# Altium PCB PCB.pcbdoc
Units mm, origin at the board's own origin, x right, y up, seen from the top; angles counter-clockwise.
Board outline 133.95 x 51.98 mm, 4 copper layers (Top Layer, Inner1, Inner2, Bottom Layer); 41 components, 31 nets, 209 pads, 446 vias.
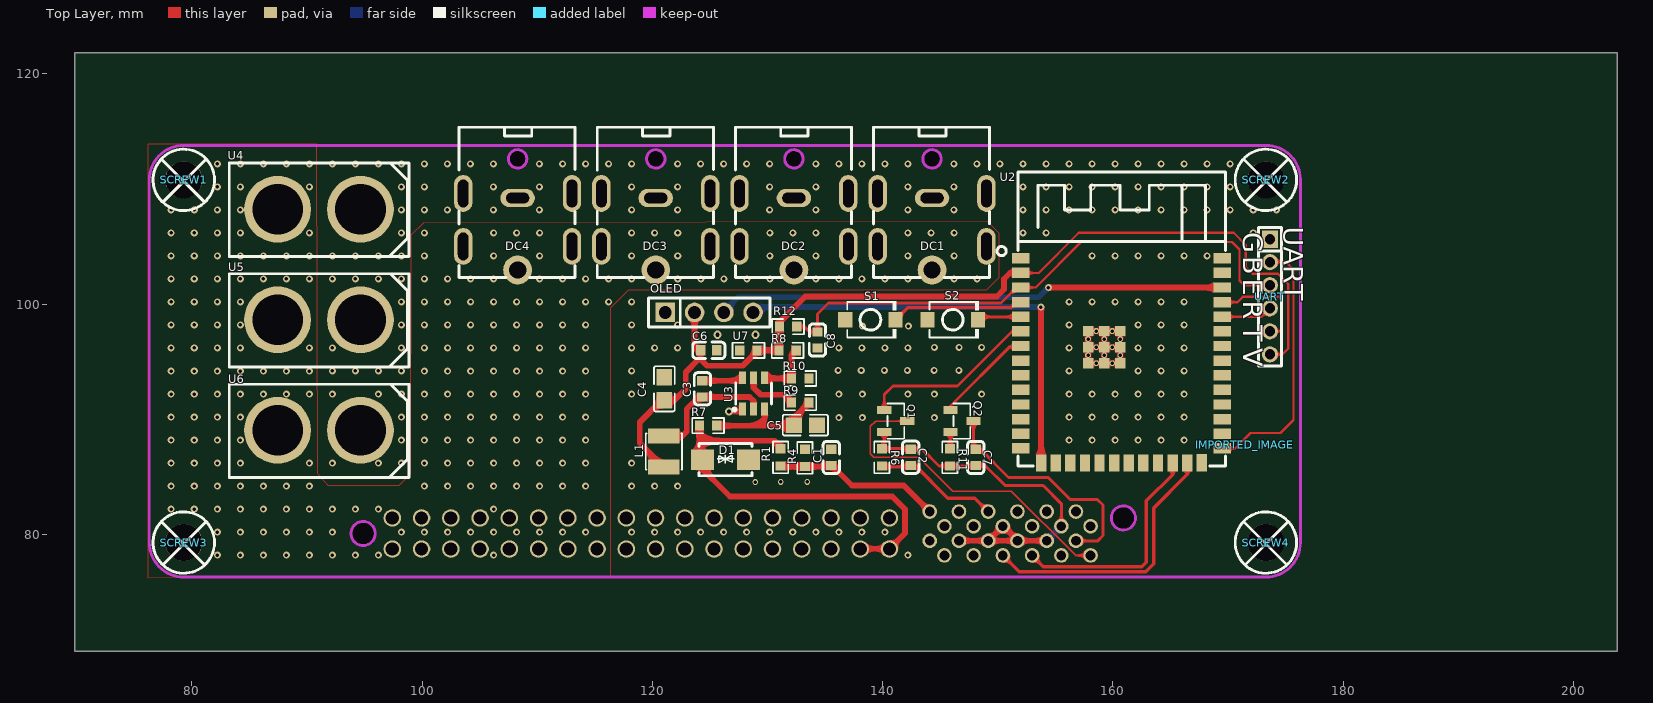
[diagram p0: Top Layer view]
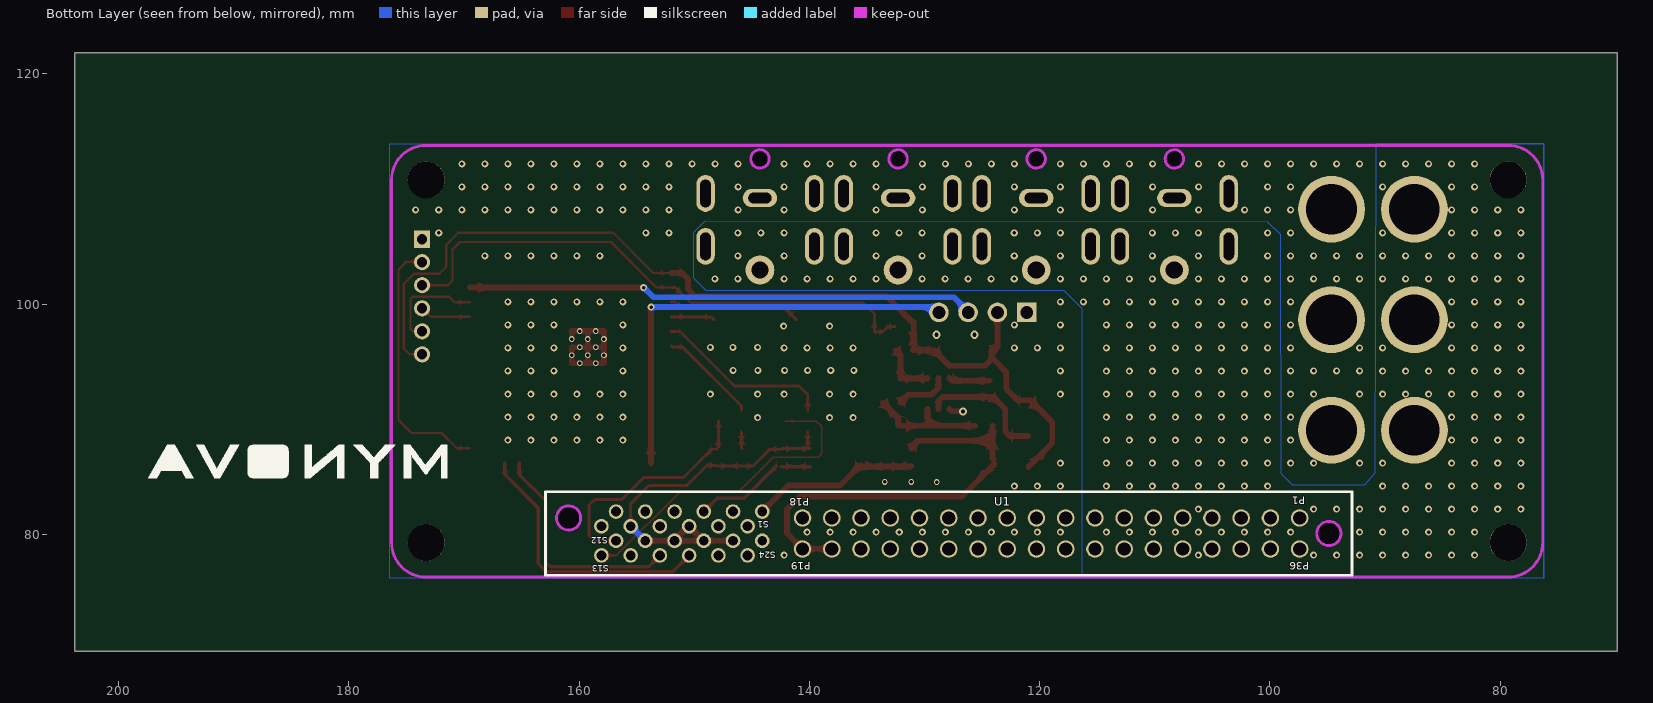
[diagram p1: Bottom Layer view, seen from below]

## Layer stack, top to bottom
Top Layer: signal copper (thickness not stored)
Dielectric: dielectric 0.32, FR-4, Dk 4.8
Inner1: signal copper (thickness not stored)
Dielectric: dielectric 0.32, FR-4, Dk 4.8
Inner2: signal copper (thickness not stored)
Dielectric: dielectric 0.32, FR-4, Dk 4.8
Bottom Layer: signal copper (thickness not stored)

## Board outline
203.8,69.85 69.85,69.85 69.85,121.826 203.8,121.826

## Design rules (kind name [scope] priority, off if disabled: settings)
Clearance copperThickness1oz [All] p1: gap=0.178 ignorepadtopadclearanceinfootprint=FALSE except(0.102: Track-Track; 0.152: Track-SMDPad SMDPad-SMDPad Track-THPad SMDPad-THPad THPad-THPad Track-Via SMDPad-Via THPad-Via Via-Via Track-Fill SMDPad-Fill THPad-Fill Via-Fill Fill-Fill SMDPad-Region THPad-Region Via-Region Fill-Region Region-Region Track-Poly SMDPad-Poly THPad-Poly Via-Poly Fill-Poly Poly-Poly Track-Text SMDPad-Text THPad-Text Via-Text Fill-Text Region-Text Poly-Text Text-Text Track-Hole SMDPad-Hole THPad-Hole Via-Hole Fill-Hole Region-Hole Poly-Hole Text-Hole; 0.3: Track-Region Region-Poly Track-Sheet SMDPad-Sheet THPad-Sheet Via-Sheet Fill-Sheet Region-Sheet Poly-Sheet Text-Sheet Sheet-Hole)
Clearance copperThickness2oz [All] p1: gap=0.178 ignorepadtopadclearanceinfootprint=FALSE except(0.152: Track-SMDPad SMDPad-SMDPad Track-THPad SMDPad-THPad THPad-THPad Track-Via SMDPad-Via THPad-Via Via-Via Track-Fill SMDPad-Fill THPad-Fill Via-Fill Fill-Fill SMDPad-Region THPad-Region Via-Region Fill-Region Region-Region Track-Poly SMDPad-Poly THPad-Poly Via-Poly Fill-Poly Poly-Poly Track-Text SMDPad-Text THPad-Text Via-Text Fill-Text Region-Text Poly-Text Text-Text Track-Hole SMDPad-Hole THPad-Hole Via-Hole Fill-Hole Region-Hole Poly-Hole Text-Hole; 0.203: Track-Track; 0.3: Track-Region Region-Poly Track-Sheet SMDPad-Sheet THPad-Sheet Via-Sheet Fill-Sheet Region-Sheet Poly-Sheet Text-Sheet Sheet-Hole)
DiffPairsRouting differentialPair [All] p1: maxuncoupledlength=10 minlimit=0 maxlimit=5.9843 mostfreqgap=5.9843 toplayer_minwidth=5 toplayer_prefwidth=10 toplayer_maxwidth=100 bottomlayer_minwidth=5 bottomlayer_prefwidth=10 bottomlayer_maxwidth=100 midlayer1_minwidth=5 midlayer1_prefwidth=10 midlayer1_maxwidth=100 midlayer2_minwidth=5 midlayer2_prefwidth=10 midlayer2_maxwidth=100
PasteMaskExpansion pasteMaskExpansion [All] p1: expansion=0
PlaneConnect innerPlane [All] p1: planeconnectstyle=Relief reliefexpansion=0.508 reliefentries=4 reliefconductorwidth=0.254 reliefairgap=0.254
PolygonConnect copperRegion [All] p1: connectstyle=Relief reliefentries=4 reliefconductorwidth=10 polygonreliefangle="90 Angle" airgapwidth=10
PolygonConnect copperDirect [All] p1: connectstyle=Direct reliefentries=4 reliefconductorwidth=10 polygonreliefangle="90 Angle" airgapwidth=10
RoutingVias viaSize [All] p1: viastyle="Through Hole" holewidth=12.0078 minholewidth=11.811 maxholewidth=248.0314 width=24.0158 minwidth=19.685 maxwidth=393.7008
SolderMaskExpansion solderMaskExpansion [All] p1: useseparateexpansions=TRUE expansion=2.0079 expansionbottom=2.0079
Width copperThickness1oz [All] p1: maxlimit=100 minlimit=5 preferedwidth=10
Width copperThickness2oz [All] p1: maxlimit=100 minlimit=8 preferedwidth=10

## Components (designator, comment, footprint, x,y, rotation, side; value= is the part's Value field where it differs from the comment)
C1 "CC0603JRNPO9BN101" C0603 135.55,86.701 r90 top
C2 "CC0603JRNPO9BN101" C0603 142.445,86.701 r270 top
C3 "0603B104K500NT" C0603 124.35,92.651 r270 top
C4 "CL21A476MQYNNNE" C0805 121.05,92.651 r90 top
C5 "CL21A106KAYNNNE_C15850" C0805 133.3,89.501 r0 top
C6 "0603B104K500NT" C0603 124.9,96 r180 top
C7 "CC0603JRNPO9BN101" C0603 148.1,86.701 r90 top
C8 "CC0603KRX5R8BB105" C0603 134.35,96.901 r90 top
D1 "SMAJ12CA_C698919" SMA_L4.4-W2.6-LS5.0-BI 126.35,86.501 r180 top
DC1 "DC-091-A250" DC-IN-TH_DC-091-A250 144.3,106.301 r270 top
DC2 "DC-091-A250" DC-IN-TH_DC-091-A250 132.3,106.301 r270 top
DC3 "DC-091-A250" DC-IN-TH_DC-091-A250 120.3,106.301 r270 top
DC4 "DC-091-A250" DC-IN-TH_DC-091-A250 108.3,106.301 r270 top
IMPORTED_IMAGE "IMPORTED_IMAGE" IMPORTED_IMAGE 171.45,87.801 r0 top
L1 "SWPA3015S4R7MT" IND-SMD_L3.0-W3.0_FNR30XXS 121,87.201 r90 top
OLED "2.54-1*4P母" HDR-TH_4P-P2.54-V-F 124.941,99.288 r0 top
Q1 "DTC143ZCA_C15236" SOT-23-3_L2.9-W1.3-P1.90-LS2.4-BR 141.15,89.851 r180 top
Q2 "DTC143ZCA_C15236" SOT-23-3_L2.9-W1.3-P1.90-LS2.4-BR 146.9,89.851 r180 top
R1 "RC0603FR-078K2L" R0603 131.15,86.701 r90 top
R4 "RC0603FR-073KL" R0603 133.25,86.651 r270 top
R6 "RC0603FR-071KL" R0603 139.95,86.701 r90 top
R7 "0603WAF0000T5E" R0603 124.85,89.451 r180 top
R8 "RC0603FR-07100KL" R0603 131.75,96.001 r180 top
R9 "RC0603FR-07100KL" R0603 132.85,91.451 r0 top
R10 "0603WAF3162T5E" R0603 132.85,93.551 r180 top
R11 "0603WAF2200T5E" R0603 145.85,86.701 r90 top
R12 "0603WAF1002T5E" R0603 131.8,98.051 r180 top
S1 "TS-1088-AR02016" SW-SMD_L3.9-W3.0-P4.45 138.95,98.651 r0 top
S2 "TS-1088-AR02016" SW-SMD_L3.9-W3.0-P4.45 146.1,98.651 r0 top
SCREW1 "M3螺丝" M3螺丝 79.363,110.737 r0 top
SCREW2 "M3螺丝" M3螺丝 173.363,110.737 r0 top
SCREW3 "M3螺丝" M3螺丝 79.363,79.237 r0 top
SCREW4 "M3螺丝" M3螺丝 173.363,79.237 r0 top
U1 "10114587-001LF" 10114587-001LF 127.9,80.086 r0 bottom
U2 "ESP32-S3-WROOM-1-N16" WIRELM-SMD_ESP32-S3-WROOM-1 160.755,95.097 r0 top
U3 "MT1470" SOT-23-6_L2.9-W1.6-P0.95-LS2.8-BR 128.8,92.251 r270 top
U4 "XT60" CONN-TH_XT60 91.05,108.251 r180 top
U5 "XT60" CONN-TH_XT60 91.05,98.651 r180 top
U6 "XT60" CONN-TH_XT60 91.05,89.051 r180 top
U7 "VC060303A100DP" R0603 128.35,96.001 r0 top
UART "PZ200V-11-06P" 6PIN-2MM-UART 173.65,100.651 r270 top

## Footprints (in the part's own frame and the unit in brackets; to place one, negate y for a bottom-side part, rotate by r counter-clockwise, add the part's x,y. Pads: shape width x height; smd on the part's side, far side on the other; paste and mask are expansions set on the pad)
6PIN-2MM-UART [mm]
  round 1.4 hole 0.9: BOOT(-3,0) EN(-1,0) RXD(1,0) TXD(3,0) VCC(5,0)
  rect 1.524x1.4 hole 0.9: GND(-5,0)
  silkscreen extent -6,-1 6,1.02
10114587-001LF [mm]
  round 1.524 hole 1.15: P1(-30.48,-1.35) P2(-27.94,-1.35) P3(-25.4,-1.35) P4(-22.86,-1.35) P5(-20.32,-1.35) P6(-17.78,-1.35) P7(-15.24,-1.35) P8(-12.7,-1.35) P9(-10.16,-1.35) P10(-7.62,-1.35) P11(-5.08,-1.35) P12(-2.54,-1.35) P13(0,-1.35) P14(2.54,-1.35) P15(5.08,-1.35) P16(7.62,-1.35) P17(10.16,-1.35) P18(12.7,-1.35) P19(12.7,1.35) P20(10.16,1.35) P21(7.62,1.35) P22(5.08,1.35) P23(2.54,1.35) P24(0,1.35) P25(-2.54,1.35) P26(-5.08,1.35) P27(-7.62,1.35) P28(-10.16,1.35) P29(-12.7,1.35) P30(-15.24,1.35) P31(-17.78,1.35) P32(-20.32,1.35) P33(-22.86,1.35) P34(-25.4,1.35) P35(-27.94,1.35) P36(-30.48,1.35)
  round 1.27 hole 0.85: S1(16.2,-1.905) S2(17.47,-0.635) S3(18.74,-1.905) S4(20.01,-0.635) S5(21.28,-1.905) S6(22.55,-0.635) S7(23.82,-1.905) S8(25.09,-0.635) S9(26.36,-1.905) S10(27.63,-0.635) S11(28.9,-1.905) S12(30.17,-0.635) S13(30.17,1.905) S14(28.9,0.635) S15(27.63,1.905) S16(26.36,0.635) S17(25.09,1.905) S18(23.82,0.635) S19(22.55,1.905) S20(21.28,0.635) S21(20.01,1.905) S22(18.74,0.635) S23(17.47,1.905) S24(16.2,0.635)
  Multi-Layer board cut-out: -31.97,0 -32.111,-0.525 -32.495,-0.909 -33.02,-1.05 -33.545,-0.909 -33.929,-0.525 -34.07,0 -34.07,0 -33.966,0.456 -33.675,0.821 -33.254,1.024 -32.786,1.024 -32.365,0.821 -32.074,0.456 -31.97,0
  Multi-Layer board cut-out: 34.07,-1.35 33.929,-1.875 33.545,-2.259 33.02,-2.4 32.495,-2.259 32.111,-1.875 31.97,-1.35 31.97,-1.35 32.074,-0.894 32.365,-0.529 32.786,-0.326 33.254,-0.326 33.675,-0.529 33.966,-0.894 34.07,-1.35
  Multi-Layer keep-out circle w0.254: c-33.02,0 r1.05
  Multi-Layer keep-out circle w0.254: c33.02,-1.35 r1.05
  silkscreen extent -35.04,-3.62 35.04,3.63
C0603 [mm]
  rect 0.8x0.9 smd: 1(-0.7,0) 2(0.7,0)
  silkscreen extent -1.41,-0.71 1.39,0.72
C0805 [mm]
  rect 1.41x1.35 smd: 1(-1,0) 2(1,0)
  silkscreen extent -1.96,-0.9 1.96,0.9
CONN-TH_XT60 [mm]
  round 5.8 hole 4.4: 1(-3.6,0) 2(3.6,0)
  silkscreen extent -7.8,-4 7.8,4.1
DC-IN-TH_DC-091-A250 [mm]
  round 2.5 hole 1.5: 3(3.325,0)
  oval 1.6x3 hole 0.914 slot 2 at 90 deg: 4(-2.925,0)
  oval 3.2x1.6 hole 0.914 slot 2.4 at 0 deg copper offset 0,0: 6(-3.325,-4.725)
  oval 3.2x1.6 hole 0.914 slot 2.4 at 0 deg: 6(-3.325,4.725) 6(1.275,4.725) 6(1.275,-4.725)
  Multi-Layer board cut-out: -6.325,0.8 -6.721,0.69 -7.011,0.398 -7.116,0 -7.011,-0.397 -6.721,-0.69 -6.325,-0.8 -6.325,-0.8 -5.929,-0.69 -5.639,-0.398 -5.533,0 -5.639,0.398 -5.929,0.69 -6.325,0.8
  Multi-Layer keep-out circle w0.254: c-6.325,0 r0.8
  silkscreen extent -9.07,-5.08 3.99,5
HDR-TH_4P-P2.54-V-F [mm]
  rect 1.7x1.7 hole 1.1: 1(-3.81,0)
  round 1.7 hole 1.1: 2(-1.27,0) 3(1.27,0) 4(3.81,0)
  silkscreen extent -5.29,-1.27 5.29,1.27
IMPORTED_IMAGE [mm]
IND-SMD_L3.0-W3.0_FNR30XXS [mm]
  rect 1.3x2.72 smd: 1(1.35,0) 2(-1.35,0)
  silkscreen extent -1.58,-1.58 1.58,1.58
M3螺丝 [mil]
  round 126 hole 126: 1(-2.5,2.5)
  silkscreen extent -107,-102 102,107
R0603 [mm]
  rect 0.806x0.864 smd: 1(-0.753,0) 2(0.753,0)
  silkscreen extent -1.39,-0.66 1.39,0.66
SMA_L4.4-W2.6-LS5.0-BI [mm]
  rect 2x1.8 smd: 1(-2,0) 2(2,0)
  silkscreen extent -2.3,-1.4 2.3,1.4
SOT-23-3_L2.9-W1.3-P1.90-LS2.4-BR [mm]
  rect 1.25x0.7 smd: 1(1,-0.95) 2(1,0.95) 3(-1,0)
  silkscreen extent -0.73,-1.53 0.73,1.53
SOT-23-6_L2.9-W1.6-P0.95-LS2.8-BR [mm]
  rect 1.1x0.6 smd: 1(1.35,-0.95) 2(1.35,0) 3(1.35,0.95) 4(-1.35,0.95) 5(-1.35,0) 6(-1.35,-0.95)
  silkscreen extent -0.9,-1.78 1.52,1.55
SW-SMD_L3.9-W3.0-P4.45 [mm]
  rect 1.23x1.36 smd: 1(-2.185,0) 2(2.185,0)
  silkscreen extent -2.03,-1.62 2.25,1.62
WIRELM-SMD_ESP32-S3-WROOM-1 [mm]
  rect 1.5x0.9 smd: 1(-8.75,8.895) 2(-8.75,7.625) 3(-8.75,6.355) 4(-8.75,5.085) 5(-8.75,3.815) 6(-8.75,2.545) 7(-8.75,1.275) 8(-8.75,0.005) 9(-8.75,-1.265) 10(-8.75,-2.535) 11(-8.75,-3.805) 12(-8.75,-5.075) 13(-8.75,-6.345) 14(-8.75,-7.615) 27(8.75,-7.615) 28(8.75,-6.345) 29(8.75,-5.075) 30(8.75,-3.805) 31(8.75,-2.535) 32(8.75,-1.265) 33(8.75,0.005) 34(8.75,1.275) 35(8.75,2.545) 36(8.75,3.815) 37(8.75,5.085) 38(8.75,6.355) 39(8.75,7.625) 40(8.75,8.895)
  rect 0.9x1.5 smd: 15(-6.985,-8.895) 16(-5.715,-8.895) 17(-4.445,-8.895) 18(-3.175,-8.895) 19(-1.905,-8.895) 20(-0.635,-8.895) 21(0.635,-8.895) 22(1.905,-8.895) 23(3.175,-8.895) 24(4.445,-8.895) 25(5.715,-8.895) 26(6.985,-8.865)
  rect 0.9x0.9 smd: 41(-2.9,-0.225) 41(-2.9,1.175) 41(-2.9,2.575) 41(-1.5,-0.225) 41(-1.5,1.175) 41(-1.5,2.575) 41(-0.1,-0.225) 41(-0.1,1.175) 41(-0.1,2.575)
  silkscreen extent -10.81,-9.14 9.02,16.39

## Via types
v1: diameter 0.61, hole 0.304, Top Layer to Bottom Layer, 426 vias
v2: diameter 0.5, hole 0.3, Top Layer to Bottom Layer, 15 vias
v3: diameter 0.7, hole 0.35, Top Layer to Bottom Layer, 3 vias
v4: diameter 0.61, hole 0.305, Top Layer to Bottom Layer, 2 vias

## Nets (pads, with @x,y where several pads share a name; then routed paths per layer and width w, separated by ;. In a path a pad name is that pad's centre, name@x,y a point inside that pad or via, vN(x,y) a via of type N, cw(c..) or ccw(c..) an arc to the next point about the centre after c; other vN are vias at no path point)
$1N522: C3.1 U3.6 | length 3.6
  Top Layer w0.5: C3.1 127.6,93.351 U3.6
$1N523: C3.2 L1.1 U3.2 | length 11.2
  Top Layer w0.5: L1.1 122.61,88.551 123,88.941 123,90.901 124.05,91.951 C3.2 128.45,91.951 128.453,91.954 128.8,91.608 U3.2
$1N528: C5.1 R7.1 R9.2 U3.3 | length 10.9
  Top Layer w0.5: R7.1 129.15,89.451 ; U3.3 129.75,90.051 129.15,89.451 ; R9.2 132.3,90.147 C5.1 132.25,89.451 129.15,89.451
$1N529: R8.1 R10.2 U3.4 | length 5
  Top Layer w0.5: U3.4 129.8,93.551 R10.2 132.097,95.594 R8.1
$1N530: R9.1 U3.5 | length 4.7
  Top Layer w0.5: U3.5 128.8,92.751 129.418,92.133 131.443,92.133 132.097,91.479 R9.1
$1N27262: S2.2 U2.5 | length 3.8
  Top Layer w0.254: S2.2 148.535,98.901 151.994,98.901 U2.5
$1N27273: S1.2 U2.4 | length 11.5
  Top Layer w0.254: S1.2 142.185,99.701 151.15,99.701 151.631,100.182 U2.4
$1N46277: Q2.2 R11.2 | length 1.5
  Top Layer w0.254: R11.2 145.9,87.504 Q2.2
+12V: DC1.3 DC2.3 DC3.3 DC4.3 U1.P1 U1.P2 U1.P3 U1.P4 U1.P5 U1.P6 U1.P7 U1.P8 U1.P29 U1.P30 U1.P31 U1.P32 U1.P33 U1.P34 U1.P35 U1.P36 U4.2 U5.2 U6.2
  other v1: 82.21,78.2 84.21,78.2 86.21,78.2 88.21,78.2 90.21,78.2 92.21,78.2 94.21,78.2 96.21,78.2 106.21,78.2 82.21,80.2 84.21,80.2 86.21,80.2 88.21,80.2 90.21,80.2 92.21,80.2 98.21,80.2 100.21,80.2 102.21,80.2 104.21,80.2 106.21,80.2 108.21,80.2 110.21,80.2 112.21,80.2 114.21,80.2 78.21,82.2 80.21,82.2 82.21,82.2 84.21,82.2 86.21,82.2 88.21,82.2 90.21,82.2 92.21,82.2 94.21,82.2 96.21,82.2 106.21,82.2 78.21,84.2 80.21,84.2 82.21,84.2 84.21,84.2 86.21,84.2 88.21,84.2 90.21,84.2 100.21,84.2 102.21,84.2 104.21,84.2 106.21,84.2 108.21,84.2 110.21,84.2 112.21,84.2 114.21,84.2 78.21,86.2 80.21,86.2 82.21,86.2 84.21,86.2 90.21,86.2 100.21,86.2 102.21,86.2 104.21,86.2 106.21,86.2 108.21,86.2 110.21,86.2 112.21,86.2 114.21,86.2 78.21,88.2 80.21,88.2 82.21,88.2 84.21,88.2 100.21,88.2 102.21,88.2 104.21,88.2 106.21,88.2 108.21,88.2 110.21,88.2 112.21,88.2 114.21,88.2 78.21,90.2 80.21,90.2 82.21,90.2 84.21,90.2 100.21,90.2 102.21,90.2 104.21,90.2 106.21,90.2 108.21,90.2 110.21,90.2 112.21,90.2 114.21,90.2 78.21,92.2 80.21,92.2 82.21,92.2 84.21,92.2 86.21,92.2 88.21,92.2 90.21,92.2 100.21,92.2 102.21,92.2 104.21,92.2 106.21,92.2 108.21,92.2 110.21,92.2 112.21,92.2 114.21,92.2 78.21,94.2 80.21,94.2 82.21,94.2 84.21,94.2 86.21,94.2 88.21,94.2 90.21,94.2 100.21,94.2 102.21,94.2 104.21,94.2 106.21,94.2 108.21,94.2 110.21,94.2 112.21,94.2 114.21,94.2 78.21,96.2 80.21,96.2 82.21,96.2 84.21,96.2 90.21,96.2 100.21,96.2 102.21,96.2 104.21,96.2 106.21,96.2 108.21,96.2 110.21,96.2 112.21,96.2 114.21,96.2 78.21,98.2 80.21,98.2 82.21,98.2 84.21,98.2 100.21,98.2 102.21,98.2 104.21,98.2 106.21,98.2 108.21,98.2 110.21,98.2 112.21,98.2 114.21,98.2 78.21,100.2 80.21,100.2 82.21,100.2 84.21,100.2 100.21,100.2 102.21,100.2 104.21,100.2 106.21,100.2 108.21,100.2 110.21,100.2 112.21,100.2 114.21,100.2 116.21,100.2 78.21,102.2 80.21,102.2 82.21,102.2 84.21,102.2 86.21,102.2 88.21,102.2 90.21,102.2 100.21,102.2 102.21,102.2 104.21,102.2 106.21,102.2 110.21,102.2 112.21,102.2 114.21,102.2 116.21,102.2 118.21,102.2 122.21,102.2 124.21,102.2 126.21,102.2 128.21,102.2 130.21,102.2 134.21,102.2 136.21,102.2 138.21,102.2 140.21,102.2 142.21,102.2 146.21,102.2 148.21,102.2 78.21,104.2 80.21,104.2 82.21,104.2 84.21,104.2 86.21,104.2 88.21,104.2 90.21,104.2 100.21,104.2 106.21,104.2 110.21,104.2 118.21,104.2 122.21,104.2 130.21,104.2 134.21,104.2 142.21,104.2 146.21,104.2 78.21,106.2 80.21,106.2 82.21,106.2 84.21,106.2 90.21,106.2 100.21,106.2 106.21,106.2 108.21,106.2 110.21,106.2 118.21,106.2 120.21,106.2 122.21,106.2 130.21,106.2 132.21,106.2 134.21,106.2 142.21,106.2 144.21,106.2 146.21,106.2 78.21,108.2 80.21,108.2 82.21,108.2 84.21,108.2 82.21,110.2 84.21,110.2 90.21,110.2 82.21,112.2 84.21,112.2 86.21,112.2 88.21,112.2 90.21,112.2
+12VSB: D1.2 R1.2 R7.2 U1.P19 U1.P20 | length 36.5
  Top Layer w0.5: D1.2@123.953,86.097 126.75,83.301 140.85,83.301 141.95,82.201 141.95,80.101 140.6,78.751 U1.P20@138.128,78.751 ; D1.2@124.02,86.501 124.097,86.577 124.097,88.138 ; R7.2 124.097,88.138 ; R1.2 131.15,87.601 130.6,88.151 130.1,88.151 130.088,88.138 124.097,88.138
AC_OK: C2.2 R6.1 U1.S5 | length 10.4
  Top Layer w0.3: C2.2@142.871,85.951 145.671,83.151 148.02,83.151 U1.S5
  Top Layer w0.305: R6.1@139.95,85.897 C2.2@142.445,85.897
BOOT: U2.27 UART.BOOT | length 22.6
  Top Layer w0.2: U2.27 170.631,87.482 171.961,88.812 174.561,88.812 175.7,89.951 175.7,103.001 175,103.701 173.7,103.701 UART.BOOT
EN: C8.2 R12.1 U2.3 UART.EN | length 48.5
  Top Layer w0.2: U2.3 153.301,101.452 157.25,105.401 170.35,105.401 171,104.751 171,102.051 171.4,101.651 UART.EN@173.6,101.651
  Top Layer w0.254: R12.1 133.196,98.051 133.646,97.601 C8.2 134.35,99.151 135.3,100.101 150.295,100.101 151.646,101.452 U2.3
GND: C1.2 C4.2 C5.2 C6.1 C8.1 D1.1 DC1.4 DC2.4 DC3.4 DC4.4 OLED.1 R4.1 R10.1 S1.1 S2.1 U1.P9 U1.P10 U1.P11 U1.P12 U1.P13 U1.P14 U1.P15 U1.P16 U1.P17 U1.P18 U1.P21 U1.P22 U1.P23 U1.P24 U1.P25 U1.P26 U1.P27 U1.P28 U2.1 U2.40 U2.41 U3.1 U4.1 U5.1 U6.1 U7.1 UART.GND | length 17.5
  Top Layer w0.5: v3(126.65,90.701) 127.65,90.701 U3.1 ; v2(160.655,96.972) 160.655,97.672 v2(159.955,97.672) U2.41@159.255,97.672 ; U2.41@157.855,96.272 v2(158.555,96.272) U2.41@159.255,96.272 ; U2.41@157.855,96.272 v2(157.855,95.572) 157.855,94.872 v2(158.555,94.872) U2.41@159.05,94.872 ; U2.41@157.855,96.272 v2(157.855,96.972) 157.855,97.672 v2(158.555,97.672) U2.41@159.255,97.672 ; U2.41@159.05,94.872 159.255,94.872 v2(159.955,94.872) 160.655,94.872 v2(160.655,95.572) 160.655,96.272 v2(159.955,96.272) U2.41@159.255,96.272 ; U2.41@159.05,94.872 159.255,95.076 v2(159.255,95.572) U2.41@159.255,96.272 ; U2.41@159.255,96.272 v2(159.255,96.972) U2.41@159.255,97.672
  other v1: 142.2,78.201 118.2,80.201 120.2,80.201 122.2,80.201 124.2,80.201 126.2,80.201 128.2,80.201 130.2,80.201 132.2,80.201 134.2,80.201 136.2,80.201 138.2,80.201 140.2,80.201 118.2,84.201 120.2,84.201 122.2,84.201 92.2,86.201 96.2,86.201 98.2,86.201 118.2,86.201 98.2,88.201 156.2,88.201 158.2,88.201 160.2,88.201 162.2,88.201 164.2,88.201 166.2,88.201 136.2,90.151 138.25,90.151 144.5,90.151 98.2,90.201 156.2,90.201 158.2,90.201 160.2,90.201 162.2,90.201 164.2,90.201 166.2,90.201 92.2,92.201 96.2,92.201 98.2,92.201 118.2,92.201 136.2,92.201 138.25,92.201 142.2,92.201 144.5,92.201 148.6,92.201 156.2,92.201 158.2,92.201 160.2,92.201 162.2,92.201 164.2,92.201 166.2,92.201 92.2,94.201 94.2,94.201 96.2,94.201 98.2,94.201 118.2,94.201 156.2,94.201 162.2,94.201 164.2,94.201 166.2,94.201 136.15,94.251 138.15,94.251 140.15,94.251 142.15,94.251 144.475,94.251 146.625,94.251 92.2,96.201 98.2,96.201 118.2,96.201 120.2,96.201 122.2,96.201 136.2,96.201 138.2,96.201 140.2,96.201 142.2,96.201 156.2,96.201 162.2,96.201 164.2,96.201 166.2,96.201 144.5,96.251 146.65,96.251 148.6,96.251 138.25,98.101 142.25,98.101 98.2,98.201 118.2,98.201 122.2,98.201 156.2,98.201 162.2,98.201 164.2,98.201 166.2,98.201 98.2,100.201 118.2,100.201 156.2,100.201 158.2,100.201 160.2,100.201 162.2,100.201 164.2,100.201 166.2,100.201 92.2,102.201 94.2,102.201 96.2,102.201 98.2,102.201 92.2,104.201 94.2,104.201 96.2,104.201 98.2,104.201 158.2,104.201 160.2,104.201 162.2,104.201 164.2,104.201 166.2,104.201 168.2,104.201 98.2,106.201 152.2,106.201 154.2,106.201 172.2,106.201 98.2,108.201 100.2,108.201 102.2,108.201 106.2,108.201 110.2,108.201 118.2,108.201 122.2,108.201 130.2,108.201 134.2,108.201 142.2,108.201 146.2,108.201 152.2,108.201 154.2,108.201 156.2,108.201 158.2,108.201 160.2,108.201 162.2,108.201 164.2,108.201 166.2,108.201 168.2,108.201 170.2,108.201 172.2,108.201 174.2,108.201 98.2,110.201 100.2,110.201 106.2,110.201 110.2,110.201 118.2,110.201 122.2,110.201 130.2,110.201 134.2,110.201 142.2,110.201 146.2,110.201 152.2,110.201 154.2,110.201 156.2,110.201 158.2,110.201 160.2,110.201 162.2,110.201 164.2,110.201 166.2,110.201 168.2,110.201 170.2,110.201 92.2,112.201 94.2,112.201 96.2,112.201 98.2,112.201 100.2,112.201 102.2,112.201 104.2,112.201 106.2,112.201 110.2,112.201 112.2,112.201 114.2,112.201 116.2,112.201 118.2,112.201 122.2,112.201 124.2,112.201 126.2,112.201 128.2,112.201 130.2,112.201 134.2,112.201 136.2,112.201 138.2,112.201 140.2,112.201 142.2,112.201 146.2,112.201 148.2,112.201 150.2,112.201 152.2,112.201 154.2,112.201 156.2,112.201 158.2,112.201 160.2,112.201 162.2,112.201 164.2,112.201 166.2,112.201 168.2,112.201 170.2,112.201
  other v2: 128.95,84.551 131.15,84.568 133.456,84.568
  other v3: 125.65,97.351 128.95,97.351
ISHARE: U1.S7
PS_KILL_L: C7.2 Q2.3 U1.S14 | length 20.8
  Top Layer w0.254: Q2.3 147.9,87.601 C7.2 148.5,87.401 150.95,84.951 154.4,84.951 156.3,83.051 158.65,83.051 159.15,82.551 159.15,79.901 158.7,79.451 U1.S14
PS_ON_L: Q1.3 U1.S13 | length 28.6
  Top Layer w0.127: Q1.3 139.4,89.851 138.95,89.401 138.95,87.001 139.25,86.701 143.15,86.701 146.1,83.751 151.2,83.751 156.77,78.181 157.05,78.181
  Top Layer w0.254: 157.05,78.181 U1.S13
PS_PRESENT: C1.1 R1.1 R4.2 U1.S1 | length 14.7
  Top Layer w0.5: R1.1 131.2,85.897 R4.2 135.447,85.897 C1.1 135.6,86.001 137.35,84.251 141.84,84.251 U1.S1
PSINTERRUPT_L: U1.S9
REMOTESENSE+: U1.S23
REMOTESENSE-: U1.S21
RX0: U2.36 UART.RXD | length 4.5
  Top Layer w0.2: U2.36 172.911,98.912 UART.RXD
SCL: U1.S19 U2.25 | length 23.9
  Top Layer w0.3: U1.S19 151.88,76.751 162.85,76.751 163.549,77.45 163.549,82.3 166.47,85.221 U2.25
SCL_OLED: OLED.3 U2.38 | length 44.2
  Top Layer w0.5: v4(154.4,101.451) U2.38@169.504,101.451
  Bottom Layer w0.5: OLED.3 126.211,99.362 127.45,100.601 153.55,100.601 v4(154.4,101.451)
SDA: U1.S17 U2.24 | length 20
  Top Layer w0.3: U1.S17 153.97,77.201 162.514,77.201 162.914,77.601 162.914,82.915 165.2,85.201 U2.24
SDA_OLED: OLED.4 U2.15 | length 38.7
  Top Layer w0.5: v4(153.75,99.751) 153.77,99.73 U2.15
  Bottom Layer w0.5: OLED.4 129.214,99.751 v4(153.75,99.751)
SGND: C2.1 C7.1 Q1.2 R6.2 R11.1 U1.S6 U1.S10 U1.S16 U1.S18 U1.S20 U1.S22 | length 34.4
  Top Layer w0.254: Q1.2 140.15,87.654 R6.2 142.392,87.454 C2.1 143.45,87.401 144.903,85.947 R11.1 148.047,85.947 C7.1 148.9,86.001 150.65,84.251 153.95,84.251 155.53,82.671 U1.S10
  Top Layer w0.5: U1.S22 U1.S20 ; U1.S6@150.254,81 151.803,79.451 U1.S16 ; U1.S6 U1.S20 ; U1.S18 U1.S20
  Bottom Layer w0.5: U1.S16 U1.S10
SW: Q1.1 U2.6 | length 15.5
  Top Layer w0.254: Q1.1 140.15,92.151 140.9,92.901 146.5,92.901 151.241,97.642 U2.6
SW2: Q2.1 U2.7 | length 8.6
  Top Layer w0.254: Q2.1 145.9,91.151 151.05,96.301 151.934,96.301 U2.7
TX0: U2.37 UART.TXD | length 9.1
  Top Layer w0.2: U2.37 170.831,100.182 171.3,100.651 174.45,100.651 174.65,100.451 174.65,97.851 174.45,97.651 UART.TXD
VCC_3V3: C4.1 C6.2 L1.2 OLED.2 R8.2 R12.2 U2.2 U7.2 UART.VCC | length 86.4
  Top Layer w0.2: U2.2 153.571,102.722 157.05,106.201 170.5,106.201 171.55,105.151 171.55,103.251 172.15,102.651 174.35,102.651 175.25,101.751 175.25,96.151 174.75,95.651 UART.VCC
  Top Layer w0.5: L1.2 118.9,87.951 118.9,89.751 120.8,91.651 121.91,91.651 122.9,92.64 122.9,94.101 124.1,95.301 ; OLED.2 123.671,96.33 C6.2@124.2,95.801 ; C6.2 C6.2@124.2,95.801 ; U2.2 151.071,102.722 150.55,102.201 150.55,101.301 149.931,100.682 133.281,100.682 130.95,98.351 130.95,96.047 R8.2 129.203,96.001 127.853,94.651 124.75,94.651 124.1,95.301 ; 124.1,95.301 124.2,95.401 C6.2@124.2,95.551 ; 124.1,95.301 C6.2@124.2,95.551 ; C6.2@124.2,95.551 C6.2@124.2,95.801
pads on no net: DC1.6 DC2.6 DC3.6 DC4.6 SCREW1.1 SCREW2.1 SCREW3.1 SCREW4.1 U1.S2 U1.S3 U1.S4 U1.S8 U1.S11 U1.S12 U1.S15 U1.S24 U2.8 U2.9 U2.10 U2.11 U2.12 U2.13 U2.14 U2.16 U2.17 U2.18 U2.19 U2.20 U2.21 U2.22 U2.23 U2.26 U2.28 U2.29 U2.30 U2.31 U2.32 U2.33 U2.34 U2.35 U2.39

## Polygon pours and split planes (outlines as drawn)
GND on Inner2 (solid, remove dead copper): 76.2,76.201 176.45,76.201 176.45,113.951 76.2,113.951
GND on Inner1 (solid, remove dead copper): 76.2,76.201 176.45,76.201 176.45,113.951 76.2,113.951
GND on Top Layer (solid, remove dead copper, pour order 2): 76.3,76.301 176.55,76.301 176.55,114.051 76.3,114.051
GND on Bottom Layer (solid, remove dead copper, pour order 6): 76.2,76.201 176.45,76.201 176.45,113.951 76.2,113.951
+12V on Inner2 (solid, remove dead copper): 99.01,85.287 99.078,106.019 100.186,107.127 149.11,107.2 150.11,106.201 150.11,102.301 149.01,101.201 117.92,101.201 116.36,99.641 116.36,76.222 76.21,76.2 76.21,113.951 90.813,113.951 90.878,85.332 91.8,84.288 98.01,84.288
+12V on Inner1 (solid, remove dead copper): 99.01,85.287 99.078,106.019 100.186,107.127 149.11,107.2 150.11,106.201 150.11,102.301 149.01,101.201 117.92,101.201 116.36,99.641 116.36,76.222 76.21,76.2 76.21,113.951 90.813,113.951 90.878,85.332 91.8,84.288 98.01,84.288
+12V on Top Layer (solid, remove dead copper, pour order 0): 99.01,85.287 99.078,106.019 100.186,107.127 149.11,107.2 150.11,106.201 150.11,102.301 149.01,101.201 117.92,101.201 116.36,99.641 116.36,76.222 76.21,76.2 76.21,113.951 90.813,113.951 90.878,85.332 91.8,84.288 98.01,84.288
+12V on Bottom Layer (solid, remove dead copper, pour order 4): 99.01,85.287 99.078,106.019 100.186,107.127 149.11,107.2 150.11,106.201 150.11,102.301 149.01,101.201 117.92,101.201 116.36,99.641 116.36,76.222 76.21,76.2 76.21,113.951 90.813,113.951 90.878,85.332 91.8,84.288 98.01,84.288

## Keep-outs
Board Outline Layer:
  lines w0.254: 76.3,79.301 ccw(c79.3,79.301) 79.3,76.301 173.3,76.301 ccw(c173.3,79.301) 176.3,79.301 176.3,110.801 ccw(c173.3,110.801) 173.3,113.801 79.3,113.801 ccw(c79.3,110.801) 76.3,110.801 76.3,79.301

## Other copper
Top Layer:
  region net SGND: 140.023,88.238 140.277,88.238 ccw(c141.021,88.238) 140.382,87.857 139.832,87.857 ccw(c139.547,88.238)
  region net SGND: 140.763,87.581 140.763,87.327 ccw(c140.763,86.851) 140.382,87.137 140.382,87.772 ccw(c140.763,88.057)
  region net AC_OK: 140.839,86.05 140.839,85.745 ccw(c140.839,85.124) 140.382,85.544 140.382,86.278 ccw(c140.839,86.621)
  region net SW: 140.023,91.532 140.277,91.532 ccw(c140.753,91.532) 140.467,91.151 139.832,91.151 ccw(c139.547,91.532)
  region net SGND: 140.277,88.17 140.023,88.17 ccw(c139.547,88.17) 139.832,88.551 140.467,88.551 ccw(c140.753,88.17)
  region net PS_ON_L: 141.334,89.787 141.334,89.914 ccw(c141.334,90.152) 141.525,90.009 141.525,89.692 ccw(c141.334,89.549)
  region net $1N528: 130,90.051 129.5,90.051 ccw(c128.575,90.051) 129.45,90.351 130.05,90.351 ccw(c130.925,90.051)
  region net $1N523: 128.55,91.608 129.05,91.608 ccw(c129.322,91.608) 129.1,91.451 128.5,91.451 ccw(c128.278,91.608)
  region net $1N522: 126.8,93.101 126.8,93.601 ccw(c126.8,94.538) 127.55,93.976 127.55,93.051 ccw(c126.8,87.452)
  region net $1N530: 129.05,92.751 128.55,92.751 ccw(c127.625,92.751) 128.5,93.051 129.1,93.051 ccw(c129.975,92.751)
  region net $1N529: 130.8,93.801 130.8,93.301 ccw(c130.8,92.051) 130.05,93.051 130.05,94.151 ccw(c130.8,94.779)
  region net $1N528: 130.845,89.201 130.845,89.701 ccw(c130.845,90.638) 131.595,90.076 131.595,88.826 ccw(c130.845,88.263)
  region net $1N528: 132.315,90.516 133.374,90.868 ccw(c134.325,89.916) 133.005,90.176 131.595,90.176 ccw(c131.48,91.352)
  region net +12VSB: 124.347,88.269 123.847,88.269 ccw(c121.935,88.269) 123.693,89.019 124.5,89.019 ccw(c126.259,88.269)
  region net $1N528: 126.757,89.701 126.757,89.201 ccw(c126.757,87.564) 126.007,89.019 126.007,89.883 ccw(c126.757,91.337)
  region net $1N528: 133.235,90.729 132.911,91.111 ccw(c132.028,91.883) 133.2,91.883 134.006,91.019 ccw(c134.006,89.847)
  region net $1N530: 131.418,91.804 131.743,92.187 ccw(c132.5,92.977) 132.5,91.883 131.693,91.019 ccw(c130.434,91.019)
  region net VCC_3V3: 130.7,97.183 131.2,97.183 ccw(c132.707,97.183) 131.4,96.433 130.593,96.433 ccw(c128.008,97.183)
  region net VCC_3V3: 129.843,95.751 129.843,96.251 ccw(c129.843,97.887) 130.593,96.433 130.593,95.569 ccw(c129.843,94.114)
  region net $1N529: 132.273,95.417 131.92,95.771 ccw(c130.795,96.433) 132.1,96.433 132.906,95.569 ccw(c132.906,94.17)
  region net $1N529: 130.943,93.301 130.943,93.801 ccw(c130.943,95.437) 131.693,93.983 131.693,93.119 ccw(c130.943,91.664)
  region net $1N529: 131.847,94.733 132.347,94.733 ccw(c134.259,94.733) 132.5,93.983 131.693,93.983 ccw(c129.935,94.733)
  region net VCC_3V3: 123.494,96.153 123.848,96.506 ccw(c124.434,99.553) 124.434,96.45 123.8,95.55 ccw(c122.725,95.384)
  region net $1N523: 122.61,88.801 122.61,88.301 ccw(c122.766,87.926) 122.36,87.926 122.36,89.176 ccw(c122.766,89.176)
  region net VCC_3V3: 119.33,87.167 120.309,86.895 ccw(c121.413,87.999) 120.975,86.501 119.725,86.501 ccw(c118.226,86.063)
  region net $1N523: 125.55,92.201 125.55,91.701 ccw(c125.55,89.751) 124.8,91.551 124.8,92.351 ccw(c125.55,94.151)
  region net $1N523: 123.738,91.285 123.468,91.722 ccw(c121.987,93.203) 123.9,92.351 124.534,91.551 ccw(c124.534,90.225)
  region net $1N522: 125.55,93.601 125.55,93.101 ccw(c125.55,91.151) 124.8,92.951 124.8,93.751 ccw(c125.55,95.551)
  region net VCC_3V3: 151.071,102.472 151.071,102.972 ccw(c151.054,103.172) 151.255,103.172 151.255,102.272 ccw(c151.054,102.272)
  region net VCC_3V3: 153.055,102.822 153.055,102.622 ccw(c153.055,102.247) 152.755,102.472 152.755,102.972 ccw(c153.055,103.197)
  region net EN: 151.241,100.867 151.12,101.106 ccw(c150.581,101.51) 151.255,101.51 151.645,101.002 ccw(c151.645,100.328)
  region net EN: 153.055,101.552 153.055,101.352 ccw(c153.055,100.977) 152.755,101.202 152.755,101.702 ccw(c153.055,101.927)
  region net $1N27273: 151.24,99.611 151.12,99.851 ccw(c150.581,100.255) 151.255,100.255 151.63,99.732 ccw(c151.63,99.041)
  region net $1N27262: 150.874,98.774 150.874,99.028 ccw(c150.874,99.504) 151.255,99.218 151.255,98.583 ccw(c150.874,98.297)
  region net SW: 151.241,97.515 151.241,97.769 ccw(c149.962,97.959) 151.255,97.959 151.255,97.324 ccw(c149.962,97.324)
  region net SW2: 151.05,96.174 151.05,96.428 ccw(c151.05,96.633) 151.255,96.618 151.255,95.983 ccw(c151.05,95.968)
  region net SDA_OLED: 153.52,87.702 154.02,87.702 ccw(c155.526,87.702) 154.22,86.952 153.32,86.952 ccw(c152.014,87.702)
  region net SDA: 165.35,85.201 165.05,85.201 ccw(c164.798,85.201) 164.825,85.452 165.575,85.452 ccw(c165.602,85.201)
  region net SCL: 166.62,85.221 166.32,85.221 ccw(c166.089,85.221) 166.095,85.452 166.845,85.452 ccw(c166.851,85.221)
  region net BOOT: 170.555,87.582 170.555,87.382 ccw(c170.555,87.007) 170.255,87.232 170.255,87.732 ccw(c170.555,87.957)
  region net RX0: 170.555,99.012 170.555,98.812 ccw(c170.555,98.437) 170.255,98.662 170.255,99.162 ccw(c170.555,99.387)
  region net TX0: 170.555,100.282 170.555,100.082 ccw(c170.555,99.707) 170.255,99.932 170.255,100.432 ccw(c170.555,100.657)
  region net SCL_OLED: 168.005,101.201 168.005,101.701 ccw(c168.005,103.2) 168.755,101.902 168.755,101.002 ccw(c168.005,99.688)
  region net PS_PRESENT: 136.307,85.647 135.911,85.335 ccw(c135.116,84.275) 135.116,85.601 136,86.401 ccw(c137.078,86.401)
  region net PS_PRESENT: 134.35,85.647 134.35,86.147 ccw(c134.35,87.384) 135.1,86.401 135.1,85.601 ccw(c134.35,79.596)
  region net PS_PRESENT: 132.068,85.647 132.068,86.147 ccw(c132.068,88.059) 132.818,86.301 132.818,85.494 ccw(c132.068,83.735)
  region net PS_PRESENT: 134.432,86.147 134.432,85.647 ccw(c134.432,83.735) 133.682,85.494 133.682,86.301 ccw(c134.432,88.059)
  region net +12VSB: 130.453,87.944 130.884,88.22 ccw(c131.807,89.143) 131.582,87.857 130.718,87.149 ccw(c129.392,87.149)
  region net PS_PRESENT: 132.332,86.147 132.332,85.647 ccw(c132.332,82.871) 131.582,85.544 131.582,86.351 ccw(c132.332,87.633)
  region net PS_ON_L: 157.202,78.054 157.202,78.308 157.248,78.31 157.288,78.315 157.323,78.325 157.354,78.337 157.381,78.353 157.406,78.372 157.449,78.416 157.532,78.527 157.583,78.589 157.647,78.654 157.647,77.707 157.583,77.772 157.532,77.835 157.449,77.945 157.406,77.99 157.381,78.008 157.354,78.024 157.323,78.037 157.288,78.046 157.248,78.052
  region net PS_KILL_L: 157.668,79.578 157.668,79.324 157.622,79.322 157.582,79.316 157.547,79.307 157.516,79.294 157.489,79.278 157.464,79.26 157.421,79.215 157.338,79.105 157.287,79.042 157.223,78.977 157.223,79.924 157.287,79.859 157.338,79.797 157.421,79.686 157.464,79.642 157.489,79.623 157.516,79.607 157.547,79.595 157.582,79.585 157.622,79.58
  region net SGND: 155.403,81.589 155.657,81.589 155.659,81.543 155.665,81.503 155.674,81.468 155.687,81.437 155.702,81.409 155.721,81.385 155.765,81.341 155.876,81.259 155.939,81.208 156.003,81.144 155.057,81.144 155.121,81.208 155.184,81.259 155.295,81.341 155.339,81.385 155.357,81.409 155.373,81.437 155.386,81.468 155.395,81.503 155.401,81.543
  region net SGND: 153.392,79.201 153.392,79.701 153.454,79.706 153.515,79.72 153.573,79.742 153.63,79.77 153.685,79.804 153.738,79.842 153.837,79.924 153.837,78.977 153.738,79.059 153.685,79.097 153.63,79.131 153.573,79.159 153.515,79.181 153.454,79.196
  region net SDA: 153.71,77.673 153.497,77.461 153.466,77.49 153.435,77.513 153.404,77.531 153.374,77.545 153.314,77.56 153.252,77.563 153.187,77.559 153.117,77.552 153.04,77.546 152.955,77.547 153.624,78.216 153.624,78.13 153.619,78.053 153.612,77.983 153.607,77.918 153.611,77.856 153.626,77.796 153.639,77.766 153.657,77.736 153.681,77.705
  region net SGND: 150.942,79.959 151.357,80.25 151.404,80.21 151.455,80.177 151.51,80.15 151.568,80.129 151.627,80.112 151.689,80.099 151.814,80.079 151.086,79.474 151.086,79.537 151.082,79.603 151.073,79.669 151.059,79.734 151.04,79.798 151.014,79.857 150.981,79.911
  region net SGND: 150.852,79.201 150.852,79.701 150.914,79.706 150.975,79.72 151.034,79.742 151.091,79.77 151.145,79.804 151.198,79.842 151.297,79.924 151.297,78.977 151.198,79.059 151.145,79.097 151.091,79.131 151.034,79.159 150.975,79.181 150.914,79.196
  region net SGND: 152.588,79.701 152.588,79.201 152.526,79.196 152.465,79.181 152.407,79.159 152.35,79.131 152.295,79.097 152.242,79.059 152.143,78.977 152.143,79.924 152.242,79.842 152.295,79.804 152.35,79.77 152.407,79.742 152.465,79.72 152.526,79.706
  region net SCL: 151.17,77.673 150.958,77.461 150.926,77.49 150.895,77.513 150.865,77.531 150.835,77.545 150.774,77.56 150.713,77.563 150.648,77.559 150.578,77.552 150.501,77.546 150.415,77.547 151.084,78.216 151.085,78.13 151.079,78.053 151.072,77.983 151.068,77.918 151.071,77.856 151.086,77.796 151.099,77.766 151.117,77.736 151.141,77.705
  region net SGND: 150.013,79.93 149.66,80.284 149.7,80.331 149.733,80.384 149.759,80.441 149.779,80.502 149.794,80.564 149.804,80.628 149.816,80.756 150.485,80.087 150.358,80.075 150.294,80.064 150.231,80.049 150.171,80.029 150.113,80.003 150.061,79.971
  region net SGND: 151.25,80.358 150.958,79.942 150.911,79.982 150.856,80.014 150.797,80.04 150.734,80.06 150.668,80.074 150.602,80.083 150.537,80.086 150.474,80.086 151.078,80.814 151.099,80.689 151.112,80.628 151.128,80.568 151.149,80.511 151.176,80.456 151.209,80.405
  region net SGND: 148.312,79.201 148.312,79.701 148.374,79.706 148.435,79.72 148.494,79.742 148.551,79.77 148.605,79.804 148.658,79.842 148.757,79.924 148.757,78.977 148.658,79.059 148.605,79.097 148.551,79.131 148.494,79.159 148.435,79.181 148.374,79.196
  region net SGND: 149.617,80.241 149.971,79.888 149.93,79.84 149.897,79.787 149.871,79.73 149.851,79.67 149.836,79.607 149.826,79.543 149.814,79.415 149.145,80.085 149.272,80.096 149.336,80.107 149.399,80.122 149.46,80.142 149.517,80.168 149.57,80.201
  region net SGND: 150.048,79.701 150.048,79.201 149.986,79.196 149.925,79.181 149.867,79.159 149.81,79.131 149.755,79.097 149.702,79.059 149.603,78.977 149.603,79.924 149.702,79.842 149.755,79.804 149.81,79.77 149.867,79.742 149.925,79.72 149.986,79.706
  region net AC_OK: 148.46,82.498 148.673,82.71 148.704,82.681 148.735,82.658 148.766,82.64 148.796,82.627 148.856,82.611 148.918,82.608 148.982,82.613 149.053,82.62 149.13,82.625 149.215,82.625 148.546,81.955 148.546,82.041 148.551,82.118 148.558,82.188 148.562,82.253 148.559,82.315 148.544,82.375 148.531,82.405 148.513,82.436 148.489,82.467
  region net SGND: 147.508,79.701 147.508,79.201 147.446,79.196 147.385,79.181 147.327,79.159 147.27,79.131 147.215,79.097 147.162,79.059 147.063,78.977 147.063,79.924 147.162,79.842 147.215,79.804 147.27,79.77 147.327,79.742 147.385,79.72 147.446,79.706
  region net PS_PRESENT: 143.31,82.428 143.663,82.781 143.711,82.741 143.763,82.708 143.821,82.682 143.881,82.662 143.944,82.647 144.008,82.636 144.135,82.625 143.466,81.955 143.454,82.083 143.444,82.147 143.429,82.21 143.409,82.27 143.383,82.327 143.35,82.38
  region net +12VSB: 139.548,78.501 139.57,79.001 139.654,79.008 139.729,79.028 139.796,79.058 139.858,79.098 139.918,79.146 139.977,79.199 140.103,79.314 140.081,78.178 139.958,78.296 139.898,78.351 139.838,78.4 139.775,78.441 139.706,78.473 139.631,78.493 139.591,78.499
  region net +12VSB: 141.146,79.651 141.511,79.308 141.482,79.277 141.457,79.244 141.418,79.177 141.393,79.106 141.377,79.032 141.369,78.955 141.365,78.875 141.361,78.704 140.547,79.496 140.718,79.503 140.797,79.508 140.873,79.516 140.945,79.532 141.015,79.557 141.082,79.596
  region net +12VSB: 139.09,79.001 139.112,78.501 139.069,78.499 139.029,78.493 138.954,78.473 138.885,78.441 138.822,78.4 138.762,78.351 138.702,78.296 138.579,78.178 138.557,79.314 138.683,79.199 138.742,79.146 138.802,79.098 138.864,79.058 138.931,79.028 139.006,79.008
  region net VCC_3V3: 123.921,98.126 123.421,98.126 123.419,98.178 123.412,98.225 123.402,98.269 123.388,98.31 123.371,98.348 123.35,98.384 123.301,98.451 123.243,98.514 123.178,98.578 123.109,98.646 123.037,98.721 124.305,98.721 124.233,98.646 124.164,98.578 124.099,98.514 124.041,98.451 123.992,98.384 123.971,98.348 123.954,98.31 123.94,98.269 123.93,98.225 123.923,98.178
  region net PS_KILL_L: 147.773,88.182 148.027,88.182 ccw(c148.503,88.182) 148.217,87.801 147.65,87.801 ccw(c147.121,88.182)
  region net PS_KILL_L: 148.685,87.396 148.904,86.816 ccw(c148.436,86.348) 148.55,87.001 148.55,87.8 ccw(c149.223,87.8)
  region net SGND: 147.269,85.82 147.269,86.074 ccw(c147.269,86.551) 147.65,86.265 147.65,85.63 ccw(c147.269,85.344)
  region net SGND: 148.9,86.128 148.9,85.874 ccw(c148.9,85.457) 148.55,85.683 148.55,86.318 ccw(c148.9,86.544)
  region net $1N46277: 145.773,88.238 146.027,88.238 ccw(c146.503,88.238) 146.217,87.857 145.582,87.857 ccw(c145.297,88.238)
  region net SGND: 146.663,86.074 146.663,85.82 ccw(c146.663,85.344) 146.282,85.63 146.282,86.265 ccw(c146.663,86.551)
  region net SGND: 145.037,85.82 145.037,86.074 ccw(c145.037,86.551) 145.418,86.265 145.418,85.63 ccw(c145.037,85.344)
  region net VCC_3V3: 120.183,90.68 120.11,91.314 ccw(c119.049,92.11) 120.375,92.11 120.979,90.946 ccw(c120.979,89.62)
  region net VCC_3V3: 121.91,91.901 121.91,91.401 ccw(c122.197,91.026) 121.725,91.026 121.725,92.276 ccw(c122.197,92.276)
  region net VCC_3V3: 174.606,95.751 174.606,95.551 174.551,95.548 174.504,95.541 174.464,95.53 174.43,95.514 174.4,95.495 174.375,95.473 174.331,95.419 174.248,95.284 174.192,95.208 174.157,95.168 174.116,95.129 174.116,96.172 174.157,96.133 174.192,96.094 174.248,96.018 174.331,95.882 174.375,95.828 174.4,95.806 174.43,95.787 174.464,95.771 174.504,95.76 174.551,95.753
  region net TX0: 174.45,97.751 174.45,97.551 174.421,97.547 174.395,97.537 174.37,97.521 174.348,97.5 174.306,97.445 174.268,97.379 174.196,97.239 174.158,97.177 174.138,97.151 174.116,97.129 174.116,98.172 174.138,98.15 174.158,98.124 174.196,98.062 174.268,97.922 174.306,97.856 174.348,97.802 174.37,97.781 174.395,97.764 174.421,97.754
  region net RX0: 173.044,98.903 172.903,99.045 172.94,99.086 172.968,99.124 172.989,99.16 173.002,99.196 173.009,99.23 173.012,99.264 173.004,99.333 172.967,99.487 172.953,99.58 172.95,99.633 172.951,99.69 173.689,98.952 173.632,98.951 173.58,98.954 173.486,98.968 173.332,99.005 173.263,99.012 173.229,99.01 173.195,99.003 173.16,98.989 173.123,98.969 173.085,98.941
  region net EN: 172.693,101.551 172.693,101.751 172.748,101.753 172.795,101.76 172.836,101.771 172.87,101.787 172.899,101.806 172.925,101.828 172.968,101.882 173.052,102.018 173.107,102.094 173.142,102.133 173.183,102.172 173.183,101.129 173.142,101.168 173.107,101.208 173.052,101.284 172.968,101.419 172.925,101.473 172.899,101.495 172.87,101.514 172.836,101.53 172.795,101.541 172.748,101.548
  region net BOOT: 174.568,103.801 174.643,103.601 174.589,103.598 174.543,103.591 174.502,103.579 174.467,103.563 174.437,103.543 174.41,103.52 174.363,103.464 174.32,103.398 174.276,103.324 174.222,103.245 174.153,103.164 174.078,104.204 174.13,104.158 174.186,104.099 174.31,103.965 174.375,103.902 174.44,103.85 174.473,103.829 174.505,103.814 174.537,103.804
  region net $1N27273: 141.77,99.465 141.884,99.221 ccw(c142.423,98.817) 141.75,98.817 141.366,99.331 ccw(c141.366,100.004)
  region net $1N27262: 149.281,99.028 149.281,98.774 ccw(c149.281,98.297) 148.9,98.583 148.9,99.218 ccw(c149.281,99.504)
  region net VCC_3V3: 128.785,95.229 128.435,95.586 ccw(c127.374,96.381) 128.7,96.381 129.506,95.569 ccw(c129.618,94.397)
  region net VCC_3V3: 130.256,96.251 130.256,95.751 ccw(c130.256,94.114) 129.506,95.569 129.506,96.433 ccw(c130.256,97.887)
  region net AC_OK: 143.082,85.952 143.27,85.34 ccw(c142.356,84.426) 142.895,85.601 142.895,86.401 ccw(c143.535,86.404)
  region net AC_OK: 141.538,85.745 141.538,86.05 ccw(c141.538,86.621) 141.995,86.278 141.995,85.601 ccw(c141.538,84.948)
  region net SGND: 143.276,87.528 143.276,87.274 ccw(c143.276,86.797) 142.895,87.083 142.895,87.718 ccw(c143.276,88.004)
  region net SGND: 141.614,87.327 141.614,87.581 ccw(c141.614,88.057) 141.995,87.772 141.995,87.137 ccw(c141.614,86.851)
  region net +12VSB: 125.47,84.935 124.491,85.206 ccw(c123.387,84.102) 123.825,85.601 125.075,85.601 ccw(c126.573,86.039)
  region net +12VSB: 123.847,88.138 124.347,88.138 ccw(c125.26,88.138) 124.722,87.401 123.472,87.401 ccw(c122.933,88.138)
  region net EN: 133.646,97.474 133.646,97.728 ccw(c133.646,97.992) 133.9,97.918 133.9,97.283 ccw(c133.646,97.209)
  region net EN: 134.223,98.382 134.477,98.382 ccw(c134.953,98.382) 134.667,98.001 134.032,98.001 ccw(c133.747,98.382)
  region net SW2: 145.773,91.151 146.027,91.151 ccw(c146.217,567.781) 146.217,91.151 145.582,91.151 ccw(c145.582,567.781)
  region net $1N46277: 146.027,88.17 145.773,88.17 ccw(c145.297,88.17) 145.582,88.551 146.217,88.551 ccw(c146.503,88.17)
  region net PS_KILL_L: 148.027,89.12 147.773,89.12 ccw(c147.297,89.12) 147.582,89.501 148.217,89.501 ccw(c148.503,89.12)
  region net VCC_3V3: 131.2,96.869 130.7,96.869 ccw(c125.703,96.869) 130.643,97.619 131.45,97.619 ccw(c132.45,96.869)
  region net VCC_3V3: 131.216,98.97 131.973,99.02 ccw(c151.623,79.37) 131.45,98.483 130.643,98.483 ccw(c127.888,102.298)
  region net EN: 133.196,98.178 133.196,97.924 ccw(c133.196,97.678) 132.956,97.733 132.956,98.368 ccw(c133.196,98.423)
  region net SDA_OLED: 154.02,99.364 153.52,99.364 153.517,99.426 153.51,99.474 153.5,99.513 153.487,99.548 153.462,99.621 153.452,99.669 153.446,99.73 154.054,99.771 154.057,99.703 154.055,99.65 154.042,99.568 154.027,99.485 154.022,99.432
  region net SCL_OLED: 154.766,101.701 154.766,101.201 154.699,101.198 154.635,101.192 154.524,101.173 154.442,101.154 154.4,101.146 154.4,101.756 154.442,101.747 154.524,101.728 154.635,101.709 154.699,101.703
  region net $1N528: 129.927,89.874 ccw(c130.253,90.096) 130.253,89.701 129.15,89.451 128.546,89.701 ccw(c128.241,91.559) 129.573,90.227
  region net +12VSB: 125.847,88.388 cw(c125.847,90.888) 124.347,88.888 124.097,88.138 124.347,87.388 cw(c125.847,85.388) 125.847,87.888
  region net PS_ON_L: 156.77,78.117 156.77,78.244 ccw(c156.77,78.962) 156.959,78.27 156.959,78.092 ccw(c156.77,77.399)
Bottom Layer:
  region net SGND: 155.093,79.93 154.739,80.284 154.78,80.331 154.813,80.384 154.839,80.441 154.859,80.502 154.873,80.564 154.884,80.628 154.896,80.756 155.565,80.087 155.438,80.075 155.374,80.064 155.311,80.049 155.25,80.029 155.193,80.003 155.14,79.971
  region net SGND: 154.697,80.241 155.05,79.888 155.01,79.84 154.977,79.787 154.951,79.73 154.931,79.67 154.916,79.607 154.906,79.543 154.894,79.415 154.225,80.085 154.352,80.096 154.416,80.107 154.479,80.122 154.539,80.142 154.597,80.168 154.649,80.201
  region net SCL_OLED: 126.79,100.295 127.199,99.996 127.165,99.959 127.136,99.92 127.112,99.882 127.093,99.842 127.079,99.802 127.068,99.76 127.055,99.675 127.052,99.586 127.054,99.493 127.061,99.293 126.112,100.132 126.216,100.14 126.312,100.143 126.4,100.144 126.482,100.148 126.561,100.161 126.599,100.171 126.637,100.186 126.675,100.205 126.713,100.229 126.752,100.259
  region net SDA_OLED: 129.809,100.001 130.175,99.501 130.08,99.494 129.984,99.473 129.891,99.44 129.804,99.394 129.764,99.367 129.726,99.337 129.692,99.304 129.661,99.268 129.634,99.231 129.612,99.19 129.593,99.147 129.58,99.102 128.875,100.129 129.022,100.105 129.142,100.082 129.34,100.041 129.435,100.024 129.539,100.012 129.661,100.004
  region net SDA_OLED: 153.384,99.501 153.384,100.001 153.451,100.003 153.515,100.009 153.626,100.028 153.708,100.047 153.75,100.056 153.75,99.446 153.708,99.454 153.626,99.473 153.515,99.492 153.451,99.498
  region net SCL_OLED: 154.318,101.015 153.964,101.369 154.01,101.418 154.051,101.467 154.116,101.559 154.16,101.63 154.184,101.666 154.616,101.235 154.58,101.211 154.508,101.167 154.416,101.101 154.367,101.061

## Text inside footprints (layer, text, board x,y; h text height)
U1: Bottom Silkscreen Layer "P1" at 96.939,83.289 h0.66 r180; Bottom Silkscreen Layer "P18" at 140.021,83.162 h0.66 r180; Bottom Silkscreen Layer "P19" at 139.894,77.574 h0.66 r180; Bottom Silkscreen Layer "P36" at 96.587,77.574 h0.66 r180; Bottom Silkscreen Layer "S1" at 143.545,81.158 h0.58 r180; Bottom Silkscreen Layer "S12" at 157.54,79.761 h0.58 r180; Bottom Silkscreen Layer "S24" at 142.935,78.491 h0.58 r180; Bottom Silkscreen Layer "S13" at 157.413,77.348 h0.58 r180
UART: Top Silkscreen Layer "G" at 171.328,106.245 h1.7 r270; Top Silkscreen Layer "B" at 171.347,104.16 h1.7 r270; Top Silkscreen Layer "E" at 171.347,102.233 h1.7 r270; Top Silkscreen Layer "R" at 171.347,100.307 h1.7 r270; Top Silkscreen Layer "T" at 171.347,98.162 h1.7 r270; Top Silkscreen Layer "V" at 171.347,96.163 h1.7 r270